# EAGLE board main_v2 (EAGLE 6.3)
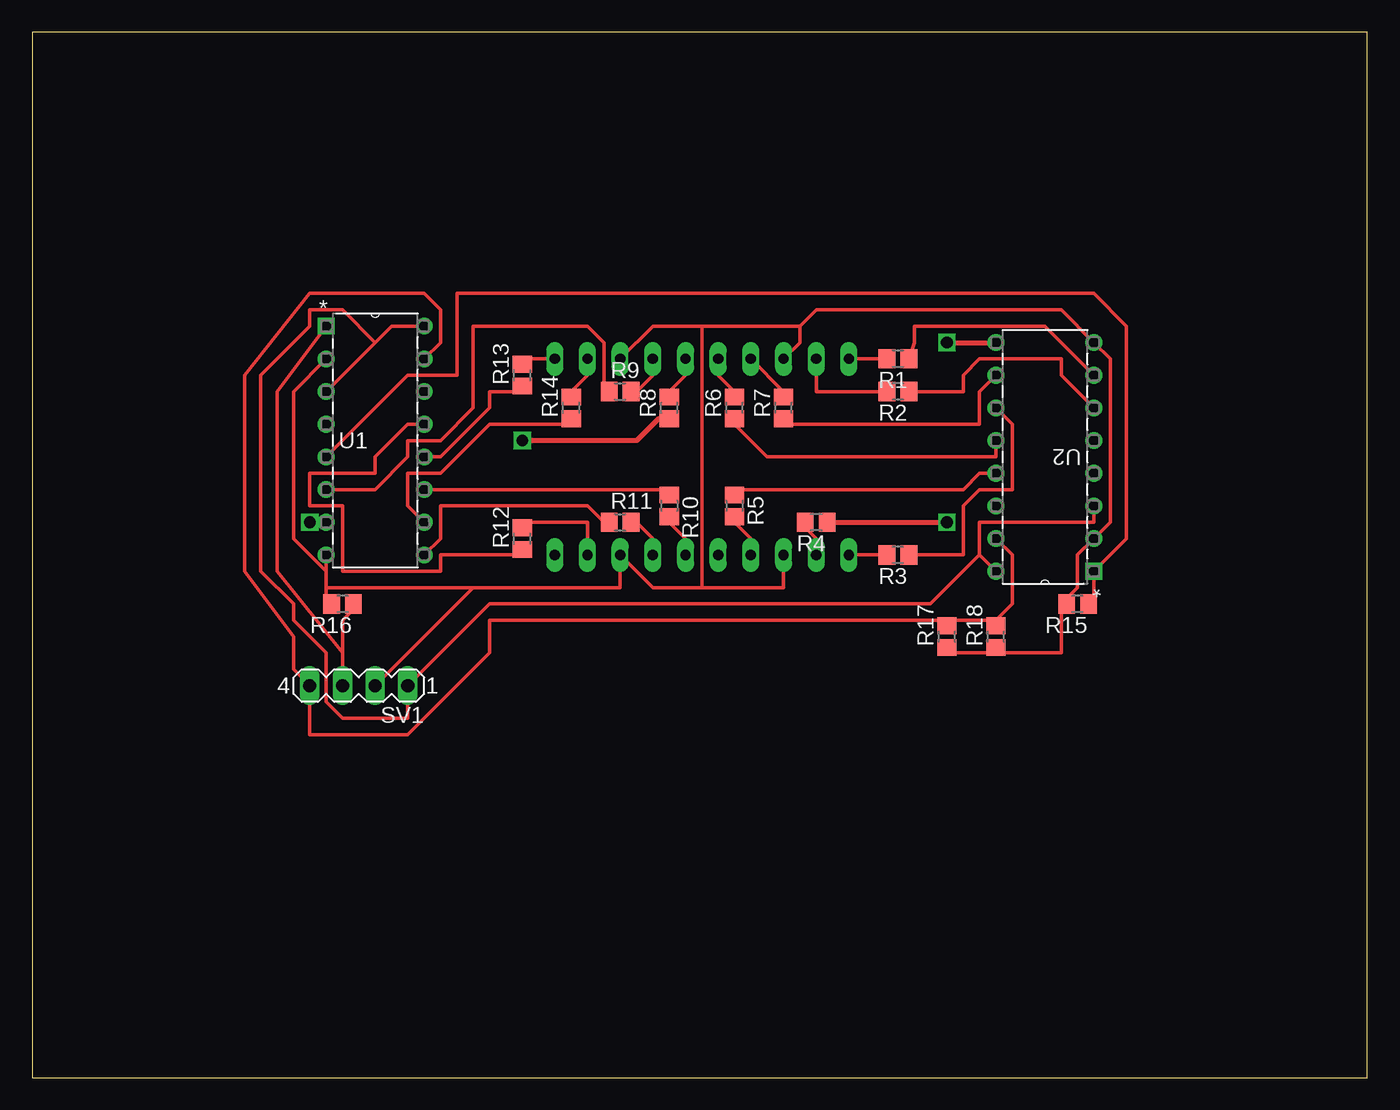
[diagram p0: board, top side]
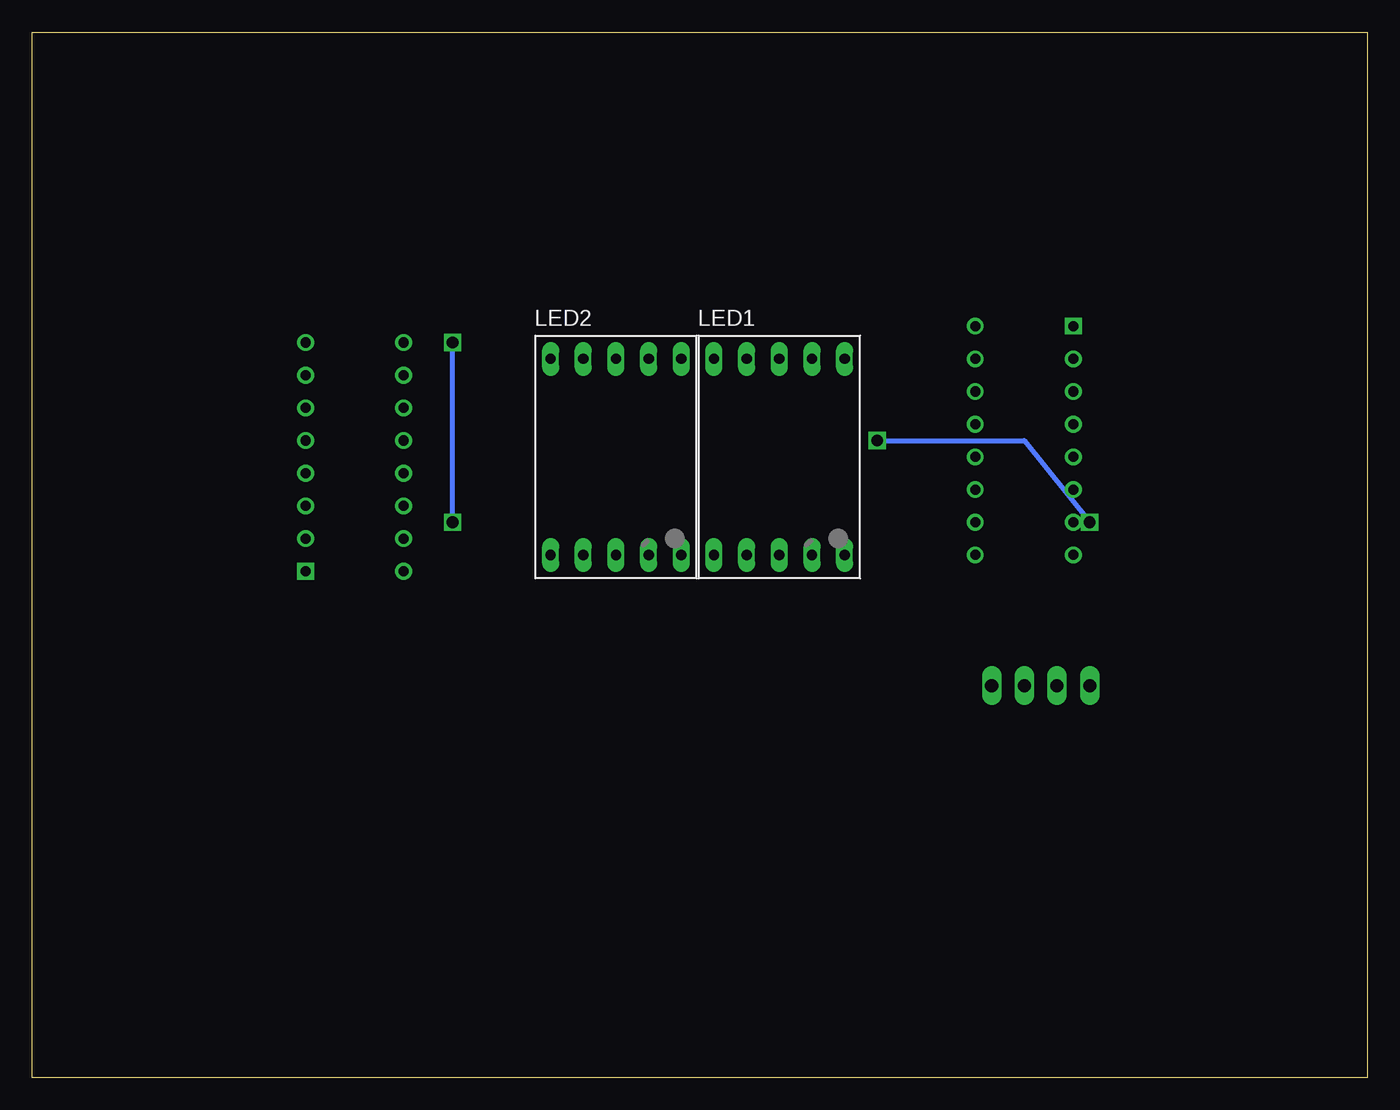
[diagram p1: board, bottom side, seen from below]

Size 103.81 x 81.27 mm. Coordinates in mm from the lower left corner, seen from the top.
Outline: 0,0 103.81,0 103.81,81.27 0,81.27 0,0
Copper layers (1*16): Top 0.035mm / dielectric 1.5mm / Bottom 0.035mm
Design rules "default": minimum track width 10mil, minimum drill 24mil, track to track 8mil, track to pad 8mil, pad to pad 8mil, via to via 8mil, smd to smd 8mil, copper to edge 40mil, drill to drill 8mil, minimum pad ring 10mil, minimum via ring 8mil, stop-mask expansion 4mil, vias tented up to drill 0mil, thermal gap 10mil

## Footprints (pad centres in the part's own frame; a part is rotated, then mirrored left to right if it is on the bottom)
SA56-11 = drill 0.8 long: 1 -5.08,-7.62; 2 -2.54,-7.62; 3 0,-7.62; 4 2.54,-7.62; 5 5.08,-7.62; 6 5.08,7.62; 7 2.54,7.62; 8 0,7.62; 9 -2.54,7.62; 10 -5.08,7.62
R0805 = smd 1.3 x 1.5: 1 -0.85,0; 2 0.85,0
MA04-1 = drill 1.016 long: 1 -3.81,0; 2 -1.27,0; 3 1.27,0; 4 3.81,0
N16 = drill 0.787 square: 1 -7.62,17.78 | drill 0.787: 2 -7.62,15.24; 3 -7.62,12.7; 4 -7.62,10.16; 5 -7.62,7.62; 6 -7.62,5.08; 7 -7.62,2.54; 8 -7.62,0; 9 0,0; 10 0,2.54; 11 0,5.08; 12 0,7.62; 13 0,10.16; 14 0,12.7; 15 0,15.24; 16 0,17.78

## Placement (x,y rotation side)
LED1  7-SEG_SA56-11  [SA56-11]  45.72,48.26 0 bottom
LED2  7-SEG_SA56-11  [SA56-11]  58.42,48.26 0 bottom
R1  220  [R0805]  67.31,55.88 180 top
R2  220  [R0805]  67.31,53.34 180 top
R3  220  [R0805]  67.31,40.64 180 top
R4  220  [R0805]  60.96,43.18 180 top
R5  220  [R0805]  54.61,44.45 270 top
R6  220  [R0805]  54.61,52.07 90 top
R7  220  [R0805]  58.42,52.07 90 top
R8  220  [R0805]  49.53,52.07 90 top
R9  220  [R0805]  45.72,53.34 0 top
R10  220  [R0805]  49.53,44.45 270 top
R11  220  [R0805]  45.72,43.18 0 top
R12  220  [R0805]  38.1,41.91 90 top
R13  220  [R0805]  38.1,54.61 90 top
R14  220  [R0805]  41.91,52.07 90 top
R15  10K  [R0805]  81.28,36.83 180 top
R16  10K  [R0805]  24.13,36.83 180 top
R17  10K  [R0805]  71.12,34.29 90 top
R18  10K  [R0805]  74.93,34.29 90 top
SV1  +5, 0, clock, reset  [MA04-1]  25.4,30.48 180 top
U1  CD4026B_N_16  [N16]  30.48,40.64 0 top
U2  CD4026B_N_16  [N16]  74.93,57.15 180 top

## Library data of the parts
LED1 LED2 = display-kingbright; OC_FARNELL: unknown; OC_NEWARK: unknown
R1-R18 = resistor
SV1 = con-lstb; OC_FARNELL: unknown; OC_NEWARK: unknown
U1 U2 = CD4026; DATASHEETURL: http://www.ti.com/lit/gpn/CD4026B; DESCRIPTION: CMOS Decade Counter/Divider with Decoded 7-Segment Display Outputs and Display Enable; FAMILY_NAME: DECADE COUNTER; GENERIC_PART_NUMBER: CD4026B; INDUSTRY_STD_PKG_TYPE: PDIP; MANUFACTURER: Texas Instruments; PACKAGE_DESIGNATOR: N; PIN_COUNT: 16

## Nets
N$1: LED2.10 R1.2
N$2: LED2.9 R2.2
N$3: LED2.1 R3.2
N$4: LED2.2 R4.2
N$5: LED2.4 R5.2
N$6: LED2.6 R6.2
N$7: LED2.7 R7.2
N$8: SV1.1 U1.3 U1.16 U2.3 U2.16
N$9: LED1.3 LED1.8 LED2.3 LED2.8 R15.2 R16.2 R17.1 R18.1 SV1.2 U1.2 U1.8 U2.2 U2.8
N$10: LED1.10 R8.2
N$11: LED1.9 R9.2
N$12: LED1.1 R10.2
N$13: LED1.2 R11.2
N$14: LED1.4 R12.2
N$15: LED1.6 R13.2
N$16: LED1.7 R14.2
N$17: R16.1 SV1.3 U1.1
N$18: R7.1 U2.10
N$19: R6.1 U2.12
N$21: R5.1 U2.13
N$22: R4.1 U2.9
N$23: R3.1 U2.11
N$24: R2.1 U2.6
N$25: R1.1 U2.7
N$26: R17.2 R18.2 SV1.4 U1.15 U2.15
N$27: R15.1 U1.5 U2.1
N$28: R9.1 U1.6
N$29: R8.1 U1.7
N$30: R12.1 U1.13
N$31: R13.1 U1.12
N$32: R10.1 U1.11
N$33: R14.1 U1.10
N$34: R11.1 U1.9

## Tracks (layer width: path | path; a pad name or v marks a point on that pad's centre or on a via)
N$1
  Top 0.254: LED2.10 R1.2
N$2
  Top 0.254: R2.2 60.96,53.34 LED2.9
N$3
  Top 0.254: LED2.1 R3.2
N$4
  Top 0.254: LED2.2 60.96,41.91 59.69,43.18 R4.2
N$5
  Top 0.254: LED2.4 55.88,41.91 54.61,43.18 R5.2
N$6
  Top 0.254: LED2.6 53.34,54.61 54.61,53.34 R6.2
N$7
  Top 0.254: LED2.7 58.42,53.34 R7.2
N$8
  Top 0.254: 73.66,40.64 U2.16 | 73.66,40.64 73.66,43.18 82.55,43.18 U2.3 | 73.66,40.64 69.85,36.83 35.56,36.83 SV1.1 29.21,27.94 24.13,27.94 22.86,29.21 22.86,33.02 20.32,35.56 20.32,36.83 17.78,39.37 17.78,54.61 21.59,58.42 21.59,59.69 24.13,59.69 26.67,57.15 | 26.67,57.15 27.94,58.42 U1.16 | 26.67,57.15 U1.3
N$9
  Top 0.254: LED2.8 59.69,57.15 59.69,58.42 | 59.69,58.42 60.96,59.69 80.01,59.69 U2.8 83.82,55.88 83.82,43.18 U2.2 81.28,40.64 81.28,38.1 80.01,36.83 | LED1.8 48.26,58.42 52.07,58.42 | 59.69,58.42 52.07,58.42 | 52.07,38.1 58.42,38.1 LED2.3 | 52.07,38.1 48.26,38.1 LED1.3 45.72,38.1 34.29,38.1 | 52.07,38.1 52.07,58.42 | U1.8 22.86,39.37 | 22.86,39.37 22.86,38.1 | 22.86,38.1 22.86,36.83 R16.2 | U1.2 20.32,53.34 20.32,41.91 22.86,39.37 | 34.29,38.1 SV1.2 | 34.29,38.1 22.86,38.1 | 74.93,33.02 71.12,33.02 R17.1 | 74.93,33.02 80.01,33.02 80.01,36.83 | 74.93,33.02 R18.1 | 80.01,36.83 R15.2
N$10
  Top 0.254: LED1.10 50.8,54.61 49.53,53.34 R8.2
N$11
  Top 0.254: LED1.9 48.26,54.61 46.99,53.34 R9.2
N$12
  Top 0.254: LED1.1 50.8,41.91 49.53,43.18 R10.2
N$13
  Top 0.254: LED1.2 48.26,41.91 46.99,43.18 R11.2
N$14
  Top 0.254: LED1.4 43.18,43.18 38.1,43.18 R12.2
N$15
  Top 0.254: LED1.6 38.1,55.88 R13.2
N$16
  Top 0.254: LED1.7 43.18,54.61 41.91,53.34 R14.2
N$17
  Top 0.254: SV1.3 24.13,33.02 | 24.13,33.02 24.13,35.56 25.4,36.83 R16.1 | U1.1 19.05,53.34 19.05,39.37 24.13,33.02
N$18
  Top 0.254: U2.10 73.66,53.34 73.66,50.8 58.42,50.8 R7.1
N$19
  Top 0.254: U2.12 74.93,48.26 57.15,48.26 54.61,50.8 R6.1
N$21
  Top 0.254: U2.13 73.66,46.99 72.39,45.72 54.61,45.72 R5.1
N$22  (via drill 0.9)
  Top 0.406: R4.1 v71.12,43.18 | v71.12,57.15 U2.9
  Bottom 0.406: v71.12,43.18 v71.12,57.15
N$23
  Top 0.254: R3.1 72.39,40.64 72.39,44.45 73.66,45.72 76.2,45.72 76.2,50.8 U2.11
N$24
  Top 0.254: R2.1 72.39,53.34 72.39,54.61 73.66,55.88 80.01,55.88 80.01,54.61 U2.6
N$25
  Top 0.254: R1.1 68.58,57.15 68.58,58.42 78.74,58.42 U2.7
N$26
  Top 0.254: U1.15 31.75,57.15 31.75,59.69 30.48,60.96 21.59,60.96 16.51,54.61 16.51,39.37 20.32,34.29 20.32,31.75 SV1.4 21.59,26.67 29.21,26.67 35.56,33.02 35.56,35.56 71.12,35.56 | 74.93,35.56 71.12,35.56 | U2.15 76.2,40.64 76.2,36.83 74.93,35.56 | 74.93,35.56 R18.2 | 71.12,35.56 R17.2
N$27
  Top 0.254: U1.5 29.21,54.61 33.02,54.61 33.02,60.96 82.55,60.96 85.09,58.42 85.09,41.91 U2.1 82.55,36.83 R15.1
N$28
  Top 0.254: U1.6 26.67,45.72 29.21,48.26 29.21,49.53 31.75,49.53 34.29,52.07 34.29,58.42 43.18,58.42 44.45,57.15 44.45,53.34 R9.1
N$29  (via drill 0.9)
  Top 0.406: R8.1 48.68,51.22 46.99,49.53 v38.1,49.53 | v21.59,43.18 U1.7
  Bottom 0.406: v38.1,49.53 26.67,49.53 v21.59,43.18
N$30
  Top 0.254: U1.13 29.21,50.8 26.67,48.26 26.67,46.99 21.59,46.99 21.59,44.45 24.13,44.45 24.13,39.37 31.75,39.37 31.75,40.64 38.1,40.64 R12.1
N$31
  Top 0.254: U1.12 31.75,48.26 35.56,52.07 35.56,53.34 38.1,53.34 R13.1
N$32
  Top 0.254: U1.11 49.53,45.72 R10.1
N$33
  Top 0.254: U1.10 29.21,44.45 29.21,46.99 31.75,46.99 35.56,50.8 41.91,50.8 R14.1
N$34
  Top 0.254: U1.9 31.75,41.91 31.75,44.45 43.18,44.45 44.45,43.18 R11.1